# EAGLE board board6 (EAGLE 6.3)
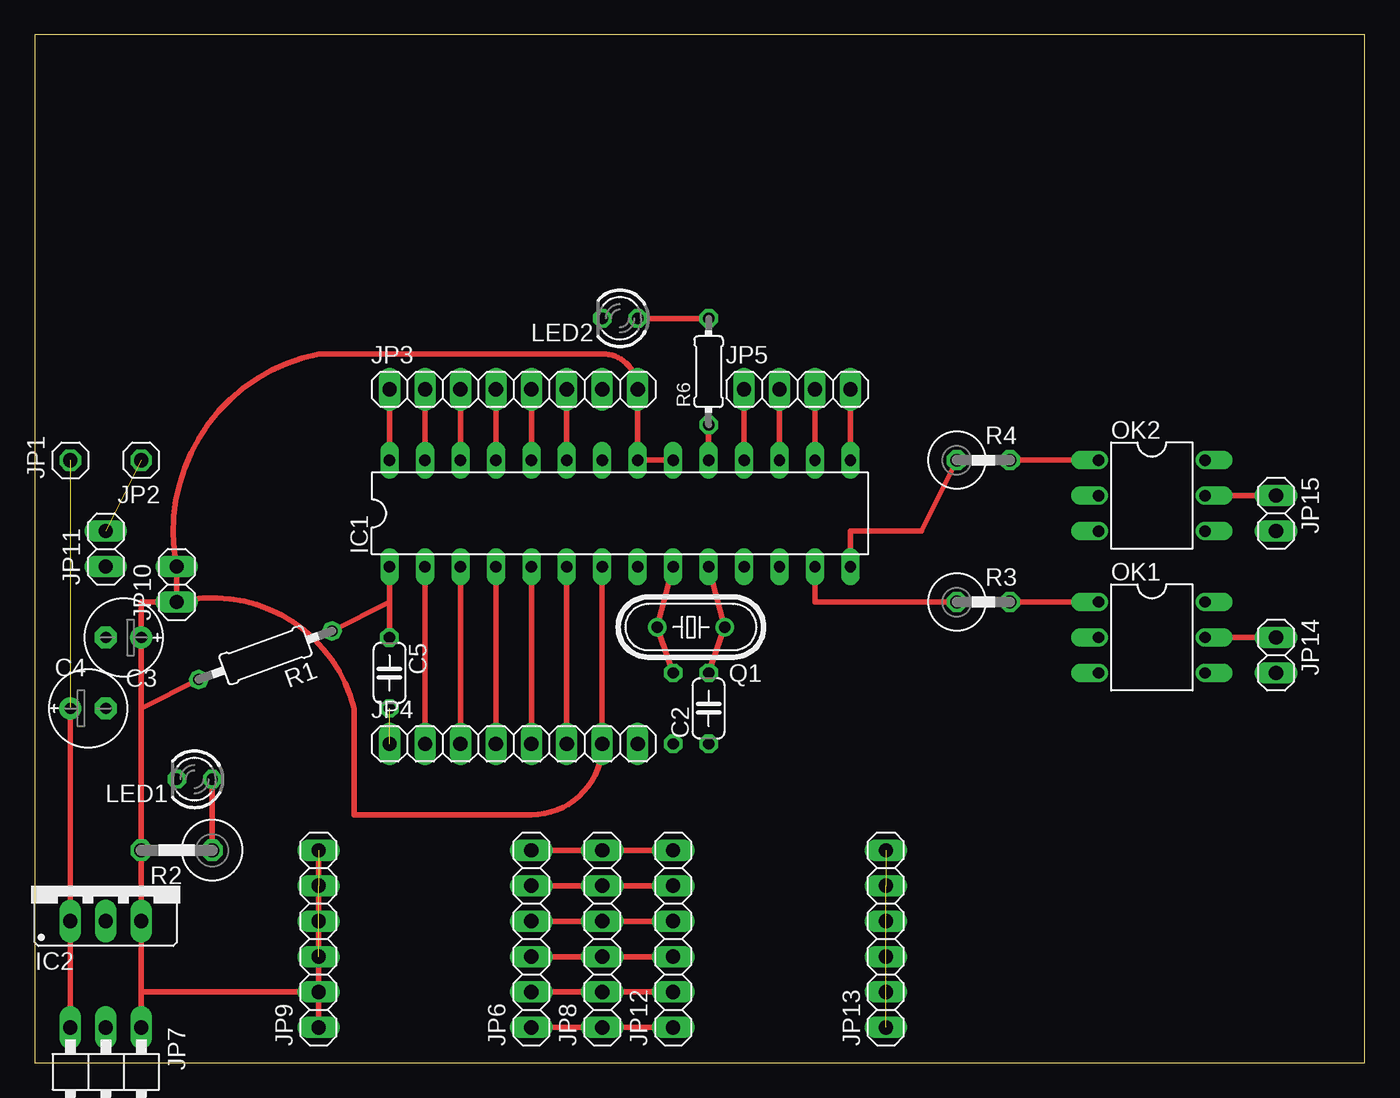
[diagram p0: board, top side]
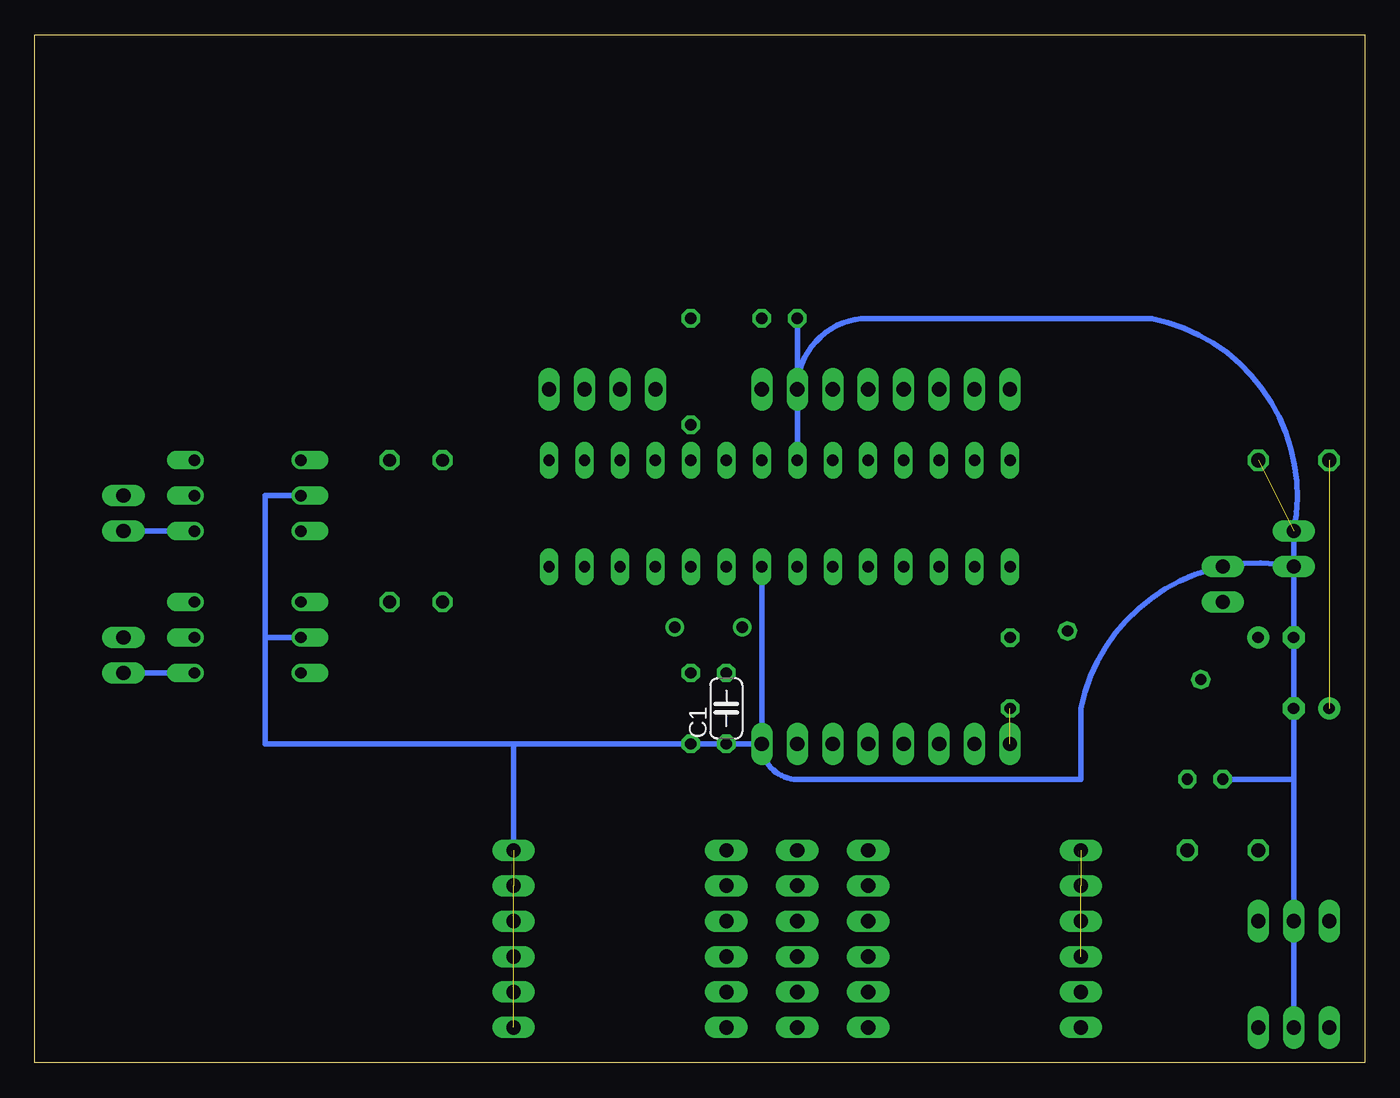
[diagram p1: board, bottom side, seen from below]

Size 95.25 x 73.65 mm. Coordinates in mm from the lower left corner, seen from the top.
Outline: 0,0 95.25,0 95.25,73.65 0,73.65 0,0
Copper layers (1*16): Top 0.035mm / dielectric 1.5mm / Bottom 0.035mm
Design rules "default": minimum track width 10mil, minimum drill 24mil, track to track 8mil, track to pad 8mil, pad to pad 8mil, via to via 8mil, smd to smd 8mil, copper to edge 40mil, drill to drill 8mil, minimum pad ring 10mil, minimum via ring 8mil, stop-mask expansion 4mil, vias tented up to drill 0mil, thermal gap 10mil

## Footprints (pad centres in the part's own frame; a part is rotated, then mirrored left to right if it is on the bottom)
C050-024X044 = drill 0.813 octagon: 1 -2.54,0; 2 2.54,0
E2,5-6E = drill 0.813 pad 1.575: + -1.27,0 | drill 0.813 pad 1.575 octagon: - 1.27,0
DIL28-3 = drill 0.813 long: 1 -16.51,-3.81; 2 -13.97,-3.81; 3 -11.43,-3.81; 4 -8.89,-3.81; 5 -6.35,-3.81; 6 -3.81,-3.81; 7 -1.27,-3.81; 8 1.27,-3.81; 9 3.81,-3.81; 10 6.35,-3.81; 11 8.89,-3.81; 12 11.43,-3.81; 13 13.97,-3.81; 14 16.51,-3.81; 15 16.51,3.81; 16 13.97,3.81; 17 11.43,3.81; 18 8.89,3.81; 19 6.35,3.81; 20 3.81,3.81; 21 1.27,3.81; 22 -1.27,3.81; 23 -3.81,3.81; 24 -6.35,3.81; 25 -8.89,3.81; 26 -11.43,3.81; 27 -13.97,3.81; 28 -16.51,3.81
78XXS = drill 1.016 long: GND 0,-2.54; IN -2.54,-2.54; OUT 2.54,-2.54
1X01 = drill 1.016 octagon: 1 0,0
1X08 = drill 1.016 long: 1 -8.89,0; 2 -6.35,0; 3 -3.81,0; 4 -1.27,0; 5 1.27,0; 6 3.81,0; 7 6.35,0; 8 8.89,0
1X04 = drill 1.016 long: 1 -3.81,0; 2 -1.27,0; 3 1.27,0; 4 3.81,0
1X06 = drill 1.016 long: 1 -6.35,0; 2 -3.81,0; 3 -1.27,0; 4 1.27,0; 5 3.81,0; 6 6.35,0
1X03/90 = drill 1.016 long: 1 -2.54,-3.81; 2 0,-3.81; 3 2.54,-3.81
1X02 = drill 1.016 long: 1 -1.27,0; 2 1.27,0
LED3MM = drill 0.813 octagon: A -1.27,0; K 1.27,0
DIL06 = drill 0.813 offset: 1 -2.54,-3.81; 2 0,-3.81; 3 2.54,-3.81; 4 2.54,3.81; 5 0,3.81; 6 -2.54,3.81
HC49/S = drill 0.813: 1 -2.413,0; 2 2.413,0
0207/10 = drill 0.813 octagon: 1 -5.08,0; 2 5.08,0
0414V = drill 1.016 octagon: 1 -2.54,0; 2 2.54,0
0411V = drill 0.914 octagon: 1 -2.54,0; 2 1.27,0
0204/7 = drill 0.813 octagon: 1 -3.81,0; 2 3.81,0

## Placement (x,y rotation side)
C1  22pF  [C050-024X044]  45.72,25.4 90 bottom
C2  22pF  [C050-024X044]  48.26,25.4 90 top
C3  10uF  [E2,5-6E]  3.81,25.4 0 top
C4  10uF  [E2,5-6E]  6.35,30.48 180 top
C5  10 nF  [C050-024X044]  25.4,27.94 270 top
IC1  ATMEGA328  [DIL28-3]  41.91,39.37 0 top
IC2  7805  [78XXS]  5.08,12.7 0 top
JP1  [1X01]  2.54,43.18 90 top
JP2  [1X01]  7.62,43.18 180 top
JP3  [1X08]  34.29,48.26 0 top
JP4  [1X08]  34.29,22.86 0 top
JP5  [1X04]  54.61,48.26 0 top
JP6  [1X06]  35.56,8.89 90 top
JP7  [1X03/90]  5.08,-1.27 180 top
JP8  [1X06]  40.64,8.89 90 top
JP9  [1X06]  20.32,8.89 90 top
JP10  [1X02]  10.16,34.29 90 top
JP11  [1X02]  5.08,36.83 90 top
JP12  [1X06]  45.72,8.89 90 top
JP13  [1X06]  60.96,8.89 90 top
JP14  [1X02]  88.9,29.21 270 top
JP15  [1X02]  88.9,39.37 270 top
LED1  Green  [LED3MM]  11.43,20.32 180 top
LED2  Green  [LED3MM]  41.91,53.34 180 top
OK1  4N35  [DIL06]  80.01,30.48 270 top
OK2  4N35  [DIL06]  80.01,40.64 270 top
Q1  16 MHz  [HC49/S]  46.99,31.22 180 top
R1  10k  [0207/10]  16.51,29.21 200 top
R2  3.9k  [0414V]  10.16,15.24 180 top
R3  1k  [0411V]  68.58,33.02 0 top
R4  1k  [0411V]  68.58,43.18 0 top
R6  330  [0204/7]  48.26,49.53 90 top

## Library data of the parts
C1-C5 R1-R4 R6 = rcl
IC1 = ic-package
IC2 = v-reg
JP1-JP15 = pinhead
LED1 LED2 = led
OK1 OK2 = optocoupler; MF: FAIRCHILD SEMICONDUCTOR; MPN: 4N35; OC_FARNELL: 1328375; OC_NEWARK: 72K9946
Q1 = crystal; OC_FARNELL: 1667008; OC_NEWARK: unknown

## Nets
+5V: C4.+ IC1.7 IC2.OUT JP4.7 JP7.1 JP9.1 JP9.2 JP9.3 JP9.4 JP9.5 JP9.6 JP10.1 JP10.2 R1.2 R2.2
GND: C1.1 C2.1 C3.- C4.- IC1.8 IC1.22 IC2.GND JP2.1 JP3.7 JP4.8 JP7.2 JP11.1 JP11.2 JP13.1 JP13.2 JP13.3 JP13.4 JP13.5 JP13.6 LED1.K LED2.K OK1.2 OK2.2
N$1: C1.2 IC1.9 Q1.2
N$2: IC1.20 IC1.21 JP3.8
N$3: C2.2 IC1.10 Q1.1
N$4: C5.2 JP4.1
N$5: JP6.2 JP8.2 JP12.2
N$6: IC1.28 JP3.1
N$7: IC1.27 JP3.2
N$8: IC1.26 JP3.3
N$9: IC1.25 JP3.4
N$10: IC1.2 JP4.2
N$11: IC1.3 JP4.3
N$12: IC1.4 JP4.4
N$13: IC1.5 JP4.5
N$14: IC1.6 JP4.6
N$15: IC1.15 JP5.4
N$16: IC1.16 JP5.3
N$17: IC1.17 JP5.2
N$18: IC1.18 JP5.1
N$19: IC1.19 R6.1
N$20: JP6.6 JP8.6 JP12.6
N$21: JP6.3 JP8.3 JP12.3
N$22: JP6.4 JP8.4 JP12.4
N$23: JP6.5 JP8.5 JP12.5
N$24: C5.1 IC1.1 R1.1
N$25: LED1.A R2.1
N$26: OK1.1 R3.2
N$27: OK2.1 R4.2
N$28: JP14.1 OK1.5
N$29: LED2.A R6.2
N$30: JP6.1 JP8.1 JP12.1
N$31: IC1.24 JP3.5
N$32: JP15.1 OK2.5
N$33: IC1.23 JP3.6
N$34: JP15.2 OK2.4
N$35: JP14.2 OK1.4
PIN5: IC1.11
PIN6: IC1.12
PIN7: IC1.13 R3.1
PIN8: IC1.14 R4.1
VCC: C3.+ IC2.IN JP1.1 JP7.3

## Tracks (layer width: path | path; a pad name or v marks a point on that pad's centre or on a via)
+5V  (3 unrouted)
  Top 0.406: 7.62,5.08 IC2.OUT R2.2 7.62,25.4 | 7.62,5.08 JP7.1 | JP10.1 JP10.2 arc-90 20.32,50.8 35.56,50.8 | IC1.7 JP4.7 arc-90 35.56,17.78 22.86,17.78 22.86,25.4 arc90 JP10.1 | 7.62,5.08 JP9.2 JP9.6 JP9.1 | JP10.1 7.62,33.02 C4.+ 7.62,25.4 | R1.2 7.62,25.4
GND  (6 unrouted)
  Bottom 0.406: JP7.2 IC2.GND 5.08,20.32 | C3.- C4.- | C4.- 5.08,20.32 | JP11.1 C4.- | JP11.1 JP11.2 arc-90 15.24,53.34 35.56,53.34 arc-90 JP3.7 | JP4.8 C1.1 C2.1 60.96,22.86 | LED1.K 5.08,20.32 | IC1.8 JP4.8 | JP4.8 arc-90 40.64,20.32 20.32,20.32 20.32,25.4 arc90 JP11.1 | IC1.22 JP3.7 | LED2.K JP3.7 | 60.96,22.86 JP13.6 | OK2.2 78.74,40.64 78.74,30.48 | 78.74,30.48 78.74,22.86 60.96,22.86 | OK1.2 78.74,30.48
N$1
  Top 0.406: IC1.9 Q1.2 C1.2
N$2
  Top 0.406: IC1.20 IC1.21 JP3.8 arc90 40.64,50.8 35.56,50.8
N$3
  Top 0.406: IC1.10 Q1.1 C2.2
N$4  (1 unrouted)
N$5
  Top 0.406: JP6.2 JP8.2 JP12.2
N$6
  Top 0.406: JP3.1 IC1.28
N$7
  Top 0.406: JP3.2 IC1.27
N$8
  Top 0.406: JP3.3 IC1.26
N$9
  Top 0.406: JP3.4 IC1.25
N$10
  Top 0.406: IC1.2 JP4.2
N$11
  Top 0.406: IC1.3 JP4.3
N$12
  Top 0.406: IC1.4 JP4.4
N$13
  Top 0.406: IC1.5 JP4.5
N$14
  Top 0.406: IC1.6 JP4.6
N$15
  Top 0.406: JP5.4 IC1.15
N$16
  Top 0.406: JP5.3 IC1.16
N$17
  Top 0.406: JP5.2 IC1.17
N$18
  Top 0.406: JP5.1 IC1.18
N$19
  Top 0.406: IC1.19 R6.1
N$20
  Top 0.406: JP6.6 JP8.6 JP12.6
N$21
  Top 0.406: JP12.3 JP8.3 JP6.3
N$22
  Top 0.406: JP6.4 JP8.4 JP12.4
N$23
  Top 0.406: JP12.5 JP8.5 JP6.5
N$24
  Top 0.406: IC1.1 25.4,33.02 | 25.4,33.02 C5.1 | R1.1 25.4,33.02
N$25
  Top 0.406: R2.1 LED1.A
N$26
  Top 0.406: R3.2 OK1.1
N$27
  Top 0.406: R4.2 OK2.1
N$28
  Top 0.406: OK1.5 JP14.1
N$29
  Top 0.406: R6.2 LED2.A
N$30
  Top 0.406: JP12.1 JP8.1 JP6.1
N$31
  Top 0.406: JP3.5 IC1.24
N$32
  Top 0.406: OK2.5 JP15.1
N$33
  Top 0.406: JP3.6 IC1.23
N$34
  Bottom 0.406: OK2.4 JP15.2
N$35
  Bottom 0.406: OK1.4 JP14.2
PIN7
  Top 0.406: IC1.13 55.88,33.02 R3.1
PIN8
  Top 0.406: IC1.14 58.42,38.1 63.5,38.1 R4.1
VCC  (1 unrouted)
  Top 0.406: JP7.3 IC2.IN C3.+